# EAGLE board Final Project Designs (EAGLE 7.6.0)

No outline drawn. Coordinates in mm, seen from the top.
Copper layers (1*16): Top 0.035mm / dielectric 1.5mm / Bottom 0.035mm
Design rules "default": minimum track width 10mil, minimum drill 24mil, track to track 8mil, track to pad 8mil, pad to pad 8mil, via to via 8mil, smd to smd 8mil, copper to edge 40mil, drill to drill 8mil, minimum pad ring 10mil, minimum via ring 8mil, stop-mask expansion 4mil, vias tented up to drill 0mil, thermal gap 10mil

## Footprints (pad centres in the part's own frame; a part is rotated, then mirrored left to right if it is on the bottom)
ZX62R-B-5P = smd 1.35 x 0.4: 1 2.675,-1.3; 2 2.675,-0.65; 3 2.675,0; 4 2.675,0.65; 5 2.675,1.3 | smd 1.9 x 1.6: M1 0,-4.1; M2 0,4.1 | smd 2 x 2.1: M3 2.35,3.1; M4 2.35,-3.1
PN87520 = drill 0.95 long: 1 -3.5,2.71; 2 -1,2.71; 3 1,2.71; 4 3.5,2.71 | hole 2.3: -6.57,0; 6.57,0
FE15 = drill 0.813 long: 1 -17.78,0; 2 -15.24,0; 3 -12.7,0; 4 -10.16,0; 5 -7.62,0; 6 -5.08,0; 7 -2.54,0; 8 0,0; 9 2.54,0; 10 5.08,0; 11 7.62,0; 12 10.16,0; 13 12.7,0; 14 15.24,0
RGB_LCD = drill 1 pad 1.778: P$1 0,-4; P$3 0,-6; P$4 0,-2 | drill 1 pad 1.778 square: P$2 0,0

## Placement (x,y rotation side)
E$1  [ZX62R-B-5P]  6.35,2.54 90 top
E$2  [ZX62R-B-5P]  6.35,48.26 270 top
E$3  [PN87520]  40.64,43.18 180 bottom
SV1  [FE15]  64.77,20.32 90 top
SV2  4PIN_GROVE_CONNECTORUNIVERSAL_4_PIN_CONNECTOR  [RGB_LCD]  52.07,24.13 0 top

## Library data of the parts
E$1 E$2 = con-hirose
E$3 = con-berg
SV1 = Tft_lcd_header; OC_FARNELL: unknown; OC_NEWARK: unknown
SV2 = Tft_lcd_header

## Nets
GND: SV2.P$1
VCC: SV2.P$2